# EAGLE board PCB_Radu v18 (EAGLE 9.7.0), part 1 of 3
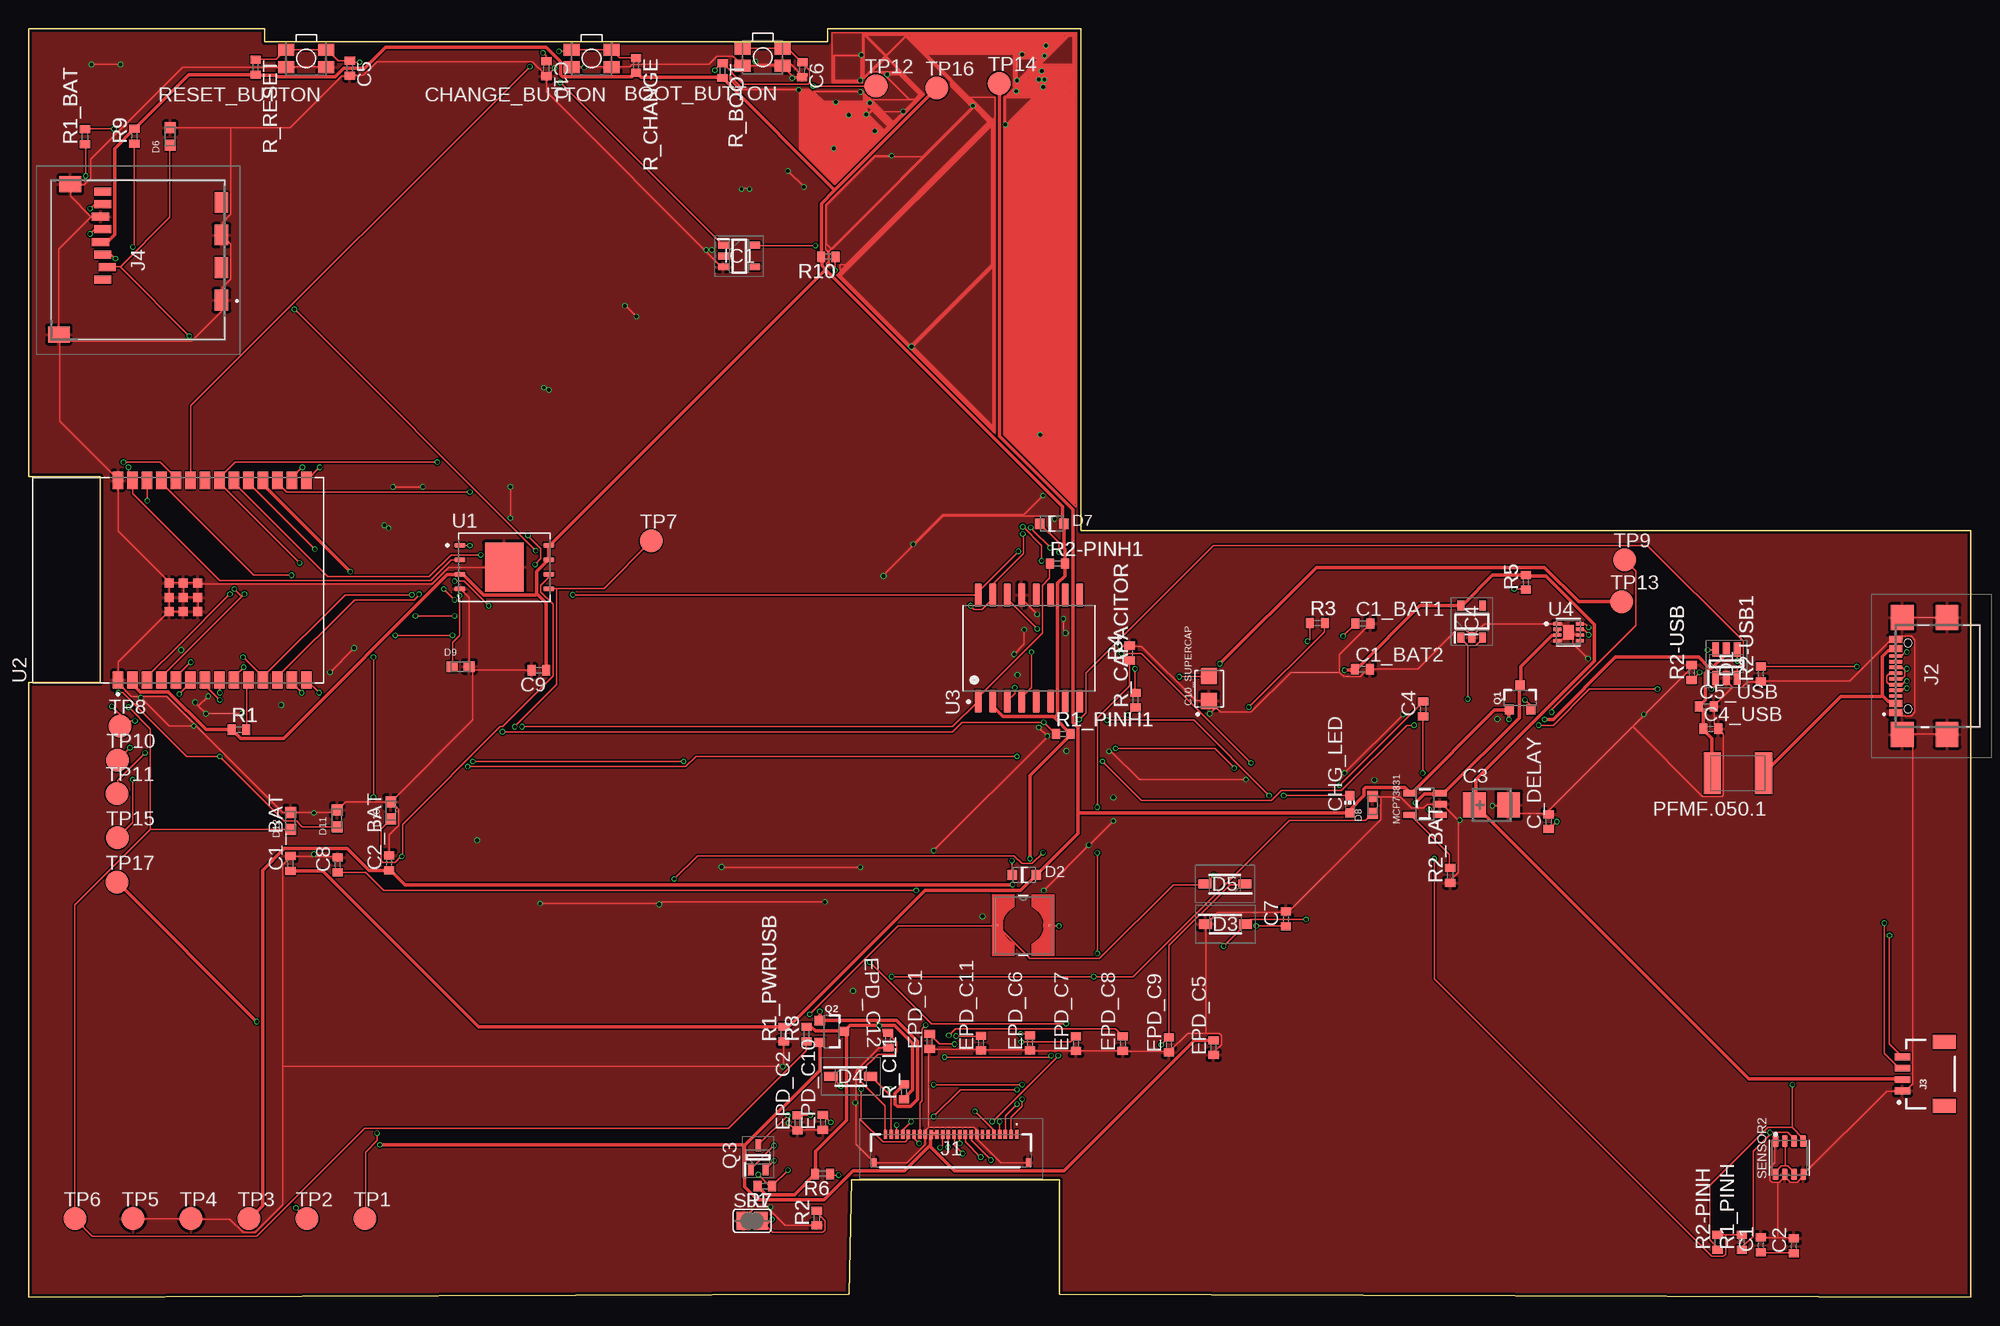
[diagram p0: board, top side]
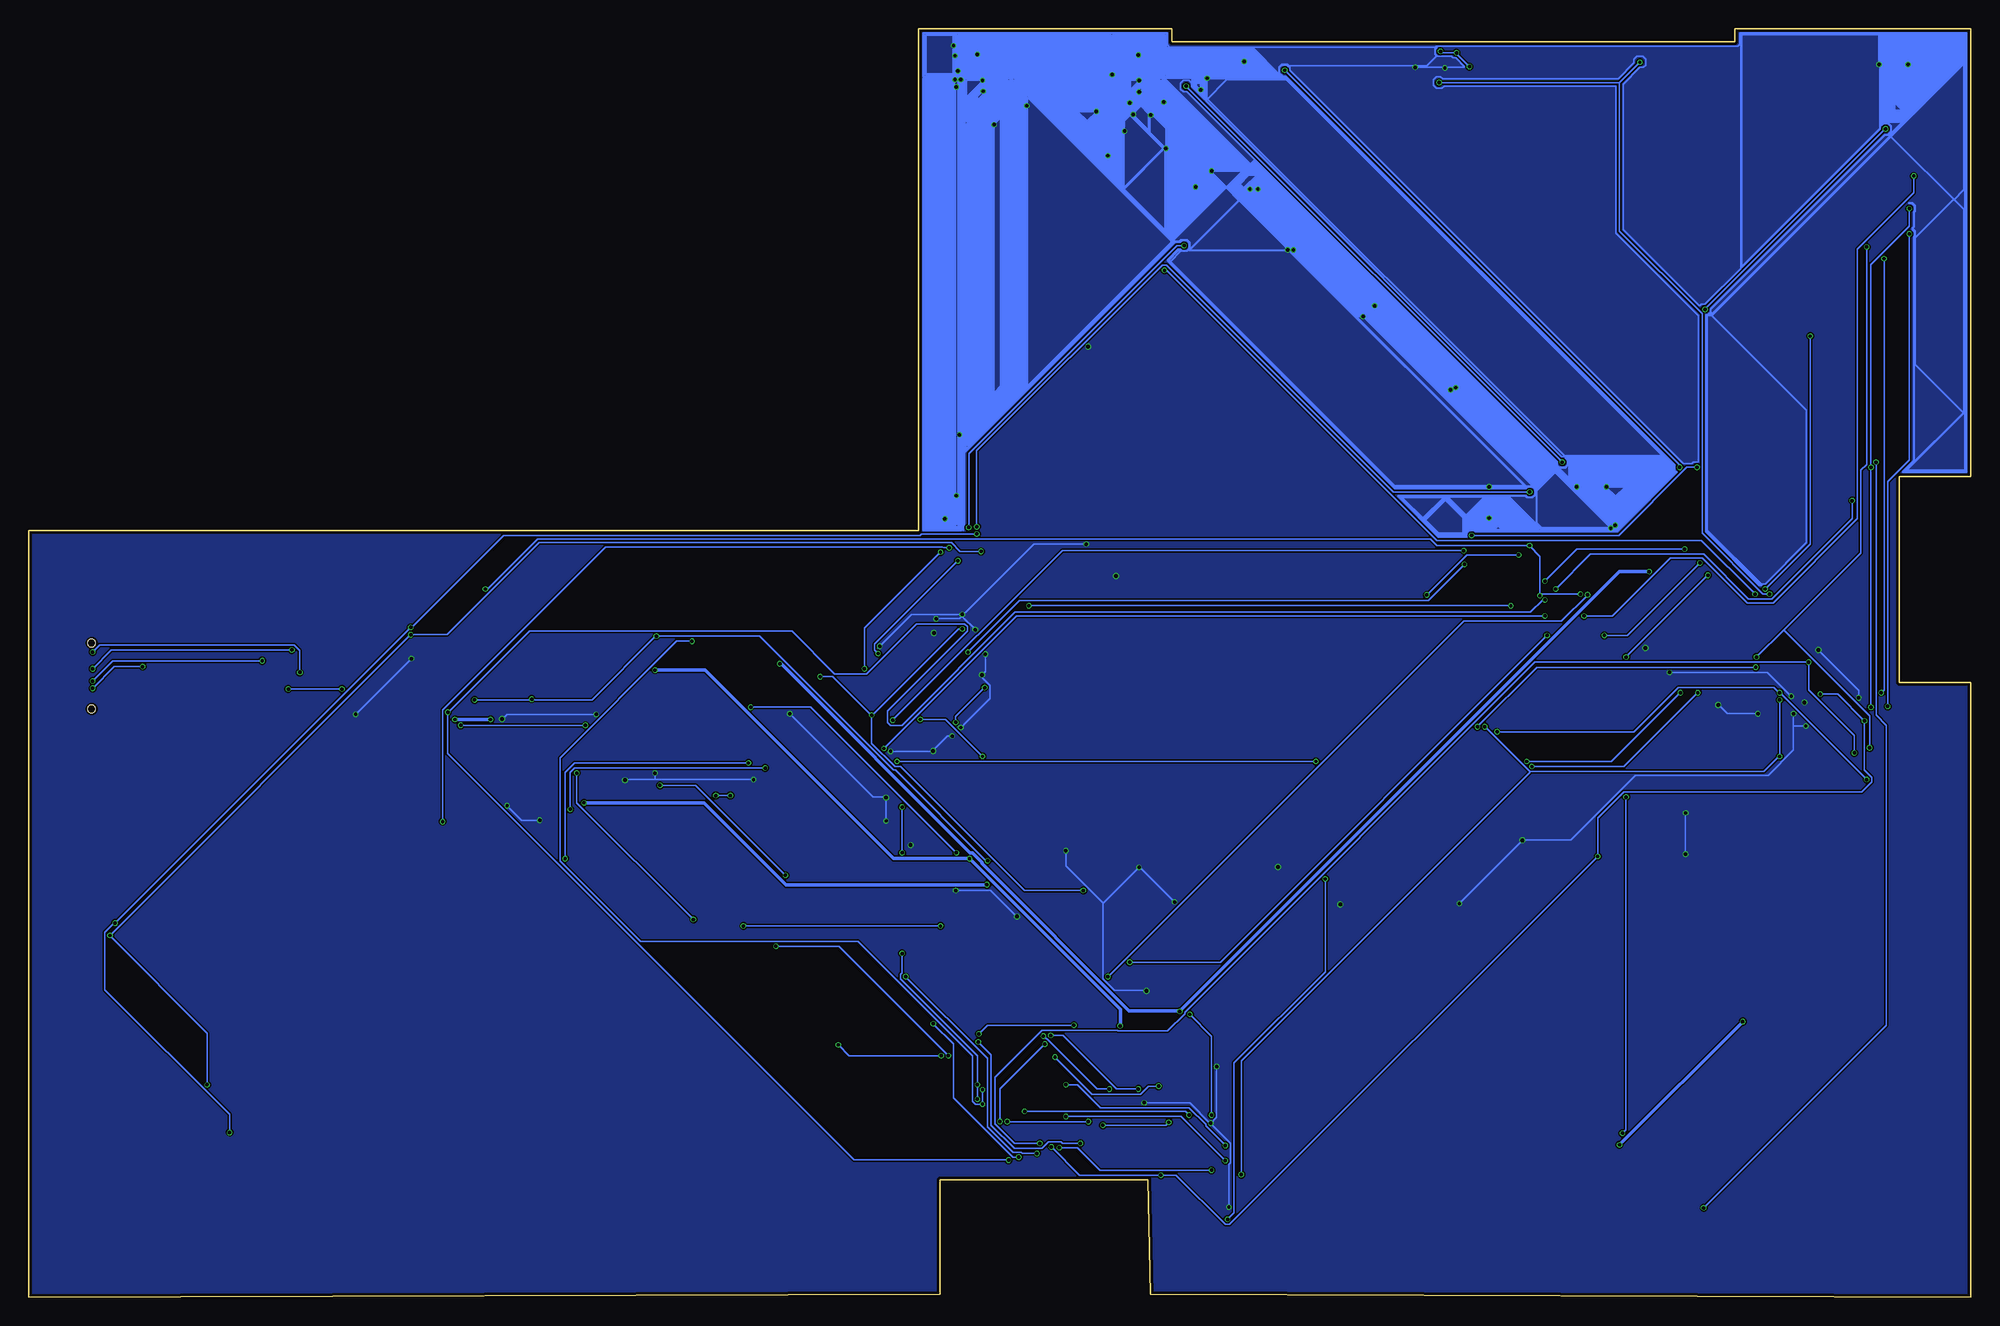
[diagram p1: board, bottom side, seen from below]

Size 170.2 x 111.2 mm. Coordinates in mm from the lower left corner, seen from the top.
Outline: 0,111.2 0,71.93 6.3,71.93 6.3,53.87 0,53.87 0,0 71.88,0.29 72.13,10.29 90.33,10.29 90.33,0.29 170.2,0 170.2,67.2 92.2,67.2 92.2,111.2 70.03,111.2 70.03,110.06 20.68,110.06 20.68,111.2 0,111.2
Copper layers (1*16): Top 0.035mm / dielectric 1.6mm / Bottom 0.035mm
Design rules "jlcpcb-2layers.dru": minimum track width 5mil, minimum drill 0.3mm, track to track 5mil, track to pad 5mil, pad to pad 5mil, via to via 5mil, smd to smd 5mil, copper to edge 0.2mm, drill to drill 6mil, minimum pad ring 10mil, minimum via ring 3mil, stop-mask expansion 4mil, vias tented up to drill 0mil, thermal gap 10mil
Net classes: 1 power: width 0.3 mm; 2 rest: width 0.15 mm

## Footprints (pad centres in the part's own frame; a part is rotated, then mirrored left to right if it is on the bottom)
MYBUTTON = smd 1.4 x 1.05: 1 1.75,0.75; 2 -1.75,0.75; 3 -1.75,-0.75; 4 1.75,-0.75
ESP32_WROVER_EAGLE-LTSPICE_C0402 = smd 0.7 x 0.9: 1 -0.65,0; 2 0.65,0
RCL_CT3528 = smd 2 x 2.2: + -1.5,0; - 1.5,0
EAGLE-LTSPICE_C0402 = smd 0.7 x 0.9: 1 -0.65,0; 2 0.65,0
CAPCP3225X100N = smd 1.4 x 1.4: 1 -1.1,0; 2 1.1,0
ADAFRUIT_CHIP-LED0603 = smd 0.8 x 0.8: A 0,-0.75; C 0,0.75
SOT95P280X145-6N = smd 1.2 x 0.6: 1 -1.25,0.95; 2 -1.25,0; 3 -1.25,-0.95; 4 1.25,-0.95; 5 1.25,0; 6 1.25,0.95
ESP32_WROVER_AVX---SD0805S020S1R0_AVX_SD0805S020S1R0_0 = smd 0.8 x 0.9: 1 -1.05,0; 2 1.05,0
SOD3716X135N = smd 1.15 x 0.8: 1 -1.75,0; 2 1.75,0
DIOC1608X36N = smd 0.97 x 0.94: 1 -0.75,0; 2 0.75,0
SOT95P280X125-5N = smd 0.9 x 0.6: 1 -1.4,0.95; 2 -1.4,0; 3 -1.4,-0.95; 4 1.4,-0.95; 5 1.4,0.95
SOT95P280X120-5N = smd 0.9 x 0.6: 1 -1.4,0.95; 2 -1.4,0; 3 -1.4,-0.95; 4 1.4,-0.95; 5 1.4,0.95
FH34SRJ24S05SH99 = smd 0.3 x 0.8: 1 5.75,1.45; 2 5.25,1.45; 3 4.75,1.45; 4 4.25,1.45; 5 3.75,1.45; 6 3.25,1.45; 7 2.75,1.45; 8 2.25,1.45; 9 1.75,1.45; 10 1.25,1.45; 11 0.75,1.45; 12 0.25,1.45; 13 -0.25,1.45; 14 -0.75,1.45; 15 -1.25,1.45; 16 -1.75,1.45; 17 -2.25,1.45; 18 -2.75,1.45; 19 -3.25,1.45; 20 -3.75,1.45; 21 -4.25,1.45; 22 -4.75,1.45; 23 -5.25,1.45; 24 -5.75,1.45 | smd 0.4 x 0.8: MP1 6.75,-1.05; MP2 -6.75,-1.05
SAMACSYS_PARTS_USB4110GFA = smd 0.3 x 1.15: A1 -3.35,3.678; A4 -2.55,3.678; A5 -1.25,3.678; A6 -0.25,3.678; A7 0.25,3.678; A8 1.25,3.678; A9 2.55,3.678; A12 3.35,3.678; B1 3.05,3.678; B4 2.25,3.678; B5 1.75,3.678; B6 0.75,3.678; B7 -0.75,3.678; B8 -1.75,3.678; B9 -2.25,3.678; B12 -3.05,3.678 | smd 2.18 x 2: MP1 -5.11,-0.827; MP2 5.11,-0.827; MP3 -5.11,3.103; MP4 5.11,3.103 | hole 0.65: -2.89,2.603; 2.89,2.603
JST04_1MM_RA = smd 0.6 x 1.35: 1 -1.5,0; 2 -0.5,0; 3 0.5,0; 4 1.5,0 | smd 1.2 x 2: NC1 2.8,-3.675; NC2 -2.8,-3.675
112ATAARR03ATTEND = smd 1.8 x 1.2: G1 10.6,10.4; G2 4.9,10.4; S1 7.75,10.4; S2 2.05,10.4 | smd 1.4 x 1.9: G3 13.6,-3.85; G4 0.45,-2.85 | smd 0.7 x 1.5: P1 8.8,0; P2 7.7,0.4; P3 6.6,0; P4 5.5,-0.2; P5 4.4,0; P6 3.3,-0.2; P7 2.2,0; P8 1.1,0
IND_4828-WE-TPC_WRE = smd 0.127 x 0.127: 1 -2.286,0; 2 2.286,0
ESP32_WROVER_SPARKFUN-IC-POWER_SOT23-5 = smd 0.55 x 1.2: 1 -0.95,-1.3; 2 0,-1.3; 3 0.95,-1.3; 4 0.95,1.3; 5 -0.95,1.3
ESP32C6_VARISTOR_CT/CN1812 = smd 1.5 x 3.6: 1 -2.25,0; 2 2.25,0
ESP32_WROVER_SPARKFUN-DISCRETESEMI_SOT23-3 = smd 0.8 x 0.9: 1 -0.95,-1; 2 0.95,-1; 3 0,1.1
SOT65P210X110-3N = smd 1.05 x 0.5: 1 -1.05,0.65; 2 -1.05,-0.65; 3 1.05,0
ESP32_WROVER_EAGLE-LTSPICE_R0402 = smd 0.7 x 0.9: 1 -0.65,0; 2 0.65,0
ESP32_WROVER_BME680_PSON80P300X300X100-8N = smd 1.016 x 0.5: 1 1.458,1.2; 2 1.458,0.4; 3 1.458,-0.4; 4 1.458,-1.2; 5 -1.458,-1.22; 6 -1.458,-0.4; 7 -1.458,0.4; 8 -1.458,1.2
SJ = smd 1.168 x 1.6: 1 -0.762,0; 2 0.762,0
TP20R = smd 2 x 2: TP 0,0
SON127P600X800X80-9N = smd 0.94 x 0.44: 1 -3.895,1.905; 2 -3.895,0.635; 3 -3.895,-0.635; 4 -3.895,-1.905; 5 3.895,-1.905; 6 3.895,-0.635; 7 3.895,0.635; 8 3.895,1.905 | smd 3.4 x 4.3: 9 0,0
XCVR_ESP32-C6-WROOM-1-N8 = smd 1.5 x 0.9: 1 -8.75,5.26; 2 -8.75,3.99; 3 -8.75,2.72; 4 -8.75,1.45; 5 -8.75,0.18; 6 -8.75,-1.09; 7 -8.75,-2.36; 8 -8.75,-3.63; 9 -8.75,-4.9; 10 -8.75,-6.17; 11 -8.75,-7.44; 12 -8.75,-8.71; 13 -8.75,-9.98; 14 -8.75,-11.25; 15 8.75,-11.25; 16 8.75,-9.98; 17 8.75,-8.71; 18 8.75,-7.44; 19 8.75,-6.17; 20 8.75,-4.9; 21 8.75,-3.63; 22 8.75,-2.36; 23 8.75,-1.09; 24 8.75,0.18; 25 8.75,1.45; 26 8.75,2.72; 27 8.75,3.99; 28 8.75,5.26 | smd 0.8 x 0.8: 29_1 -2.755,0.79; 29_2 -1.505,0.79; 29_3 -0.255,0.79; 29_4 -2.755,-0.46; 29_5 -1.505,-0.46; 29_6 -0.255,-0.46; 29_7 -2.755,-1.71; 29_8 -1.505,-1.71; 29_9 -0.255,-1.71
SOIC127P1032X265-16N = smd 2.05 x 0.59: 1 -4.655,4.445; 2 -4.655,3.175; 3 -4.655,1.905; 4 -4.655,0.635; 5 -4.655,-0.635; 6 -4.655,-1.905; 7 -4.655,-3.175; 8 -4.655,-4.445; 9 4.655,-4.445; 10 4.655,-3.175; 11 4.655,-1.905; 12 4.655,-0.635; 13 4.655,0.635; 14 4.655,1.905; 15 4.655,3.175; 16 4.655,4.445
SON50P200X200X80-9N = smd 0.76 x 0.27: 1 -0.985,0.75; 2 -0.985,0.25; 3 -0.985,-0.25; 4 -0.985,-0.75; 5 0.985,-0.75; 6 0.985,-0.25; 7 0.985,0.25; 8 0.985,0.75 | smd 0.9 x 1.3: 9 0,0

## Placement (x,y rotation side)
BOOT_BUTTON  BUTTON_CUSYOMV1  [MYBUTTON]  64.34,108.67 180 top
C1  100nF  [ESP32_WROVER_EAGLE-LTSPICE_C0402]  151.79,4.61 90 top
C1_BAT  4.7uF  [ESP32_WROVER_EAGLE-LTSPICE_C0402]  22.95,38.03 90 top
C1_BAT1  4.7uF  [ESP32_WROVER_EAGLE-LTSPICE_C0402]  116.93,59.06 0 top
C1_BAT2  4.7uF  [ESP32_WROVER_EAGLE-LTSPICE_C0402]  116.89,55.05 0 top
C2  100nF  [ESP32_WROVER_EAGLE-LTSPICE_C0402]  154.68,4.53 90 top
C2_BAT  4.7uF  [ESP32_WROVER_EAGLE-LTSPICE_C0402]  31.59,38.09 90 top
C3  100uF  [RCL_CT3528]  128.18,43.16 0 top
C4  4.7uF/25V  [ESP32_WROVER_EAGLE-LTSPICE_C0402]  122.19,51.56 90 top
C4_USB  100nF  [ESP32_WROVER_EAGLE-LTSPICE_C0402]  147.4,49.83 0 top
C5  100nF  [EAGLE-LTSPICE_C0402]  28.16,107.72 270 top
C5_USB  4.7uF  [ESP32_WROVER_EAGLE-LTSPICE_C0402]  147.02,51.8 0 top
C6  100nF  [EAGLE-LTSPICE_C0402]  67.8,107.59 268.8 top
C7  10uF  [ESP32_WROVER_EAGLE-LTSPICE_C0402]  110.17,33.17 90 top
C8  100nF  [ESP32_WROVER_EAGLE-LTSPICE_C0402]  27.1,37.92 90 top
C9  100nF  [ESP32_WROVER_EAGLE-LTSPICE_C0402]  44.72,54.96 180 top
C10  100nF  [EAGLE-LTSPICE_C0402]  45.37,107.69 270.1 top
C10_SUPERCAP  CPH3225A  [CAPCP3225X100N]  103.45,53.35 90 top
C_DELAY  100nF  [ESP32_WROVER_EAGLE-LTSPICE_C0402]  133.2,41.69 90 top
CHANGE_BUTTON  BUTTON_CUSYOMV1  [MYBUTTON]  49.34,108.58 180 top
CHG_LED  [ADAFRUIT_CHIP-LED0603]  115.77,43.22 0 top
D1  USBLC6-2SC6Y  [SOT95P280X145-6N]  148.77,55.53 90 top
D2  ESP32_WROVER_AVX---SD0805S020S1R0_AVX_SD0805S020S1R0_0_0AVX_SD0805S020S1R0_0_0  [ESP32_WROVER_AVX---SD0805S020S1R0_AVX_SD0805S020S1R0_0]  87.24,37.03 0 top
D3  MBR0530  [SOD3716X135N]  104.88,32.72 0 top
D4  MBR0530  [SOD3716X135N]  72.04,19.37 0 top
D5  MBR0530  [SOD3716X135N]  104.82,36.23 180 top
D6  PGB1010603MR  [DIOC1608X36N]  12.41,101.74 90 top
D7  ESP32_WROVER_AVX---SD0805S020S1R0_AVX_SD0805S020S1R0_0_0AVX_SD0805S020S1R0_0_0  [ESP32_WROVER_AVX---SD0805S020S1R0_AVX_SD0805S020S1R0_0]  89.66,67.81 0 top
D8  PGB1010603MR  [DIOC1608X36N]  117.77,43.17 90 top
D9  PGB1010603MR  [DIOC1608X36N]  37.87,55.28 0 top
D10  PGB1010603MR  [DIOC1608X36N]  31.75,42.67 90 top
D11  PGB1010603MR  [DIOC1608X36N]  27.04,41.96 90 top
D12  PGB1010603MR  [DIOC1608X36N]  22.96,41.75 90 top
EPD_C1  1uF/50V  [EAGLE-LTSPICE_C0402]  78.96,22.43 90 top
EPD_C2  1uF/50V  [EAGLE-LTSPICE_C0402]  67.38,15.31 90 top
EPD_C5  0.1uF/50V  [EAGLE-LTSPICE_C0402]  103.84,21.9 90 top
EPD_C6  1uF/50V  [EAGLE-LTSPICE_C0402]  87.74,22.31 90 top
EPD_C7  1uF/50V  [EAGLE-LTSPICE_C0402]  91.78,22.25 90 top
EPD_C8  1uF/50V  [EAGLE-LTSPICE_C0402]  95.88,22.25 90 top
EPD_C9  1uF/50V  [EAGLE-LTSPICE_C0402]  99.93,22.13 90 top
EPD_C10  1uF/50V  [EAGLE-LTSPICE_C0402]  69.6,15.34 90 top
EPD_C11  1uF/50V  [EAGLE-LTSPICE_C0402]  83.46,22.3 90 top
EPD_C12  1uF/50V  [EAGLE-LTSPICE_C0402]  75.33,22.54 91.8 top
IC1  BD5229G-TR  [SOT95P280X125-5N]  62.27,91.26 0 top
IC4  XC6220A331MR-G  [SOT95P280X120-5N]  126.46,59.24 90 top
J1  FH34SRJ-24S-0.5SH_99_  [FH34SRJ24S05SH99]  80.84,12.84 0 top
J2  [SAMACSYS_PARTS_USB4110GFA]  167.28,54.46 90 top
J3  QWIIC_RIGHT_ANGLE  [JST04_1MM_RA]  164.2,19.59 90 top
J4  112A-TAAR-R03_ATTEND  [112ATAARR03ATTEND]  6.51,98 270 top
L1  68uH  [IND_4828-WE-TPC_WRE]  87.16,32.61 0 top
MCP73831  ESP32_WROVER_SPARKFUN-IC-POWER_MCP73831  [ESP32_WROVER_SPARKFUN-IC-POWER_SOT23-5]  122.36,43.23 90 top
PFMF.050.1  [ESP32C6_VARISTOR_CT/CN1812]  149.78,45.95 180 top
Q1  20V/4.2A/52mΩ/1.4W  [ESP32_WROVER_SPARKFUN-DISCRETESEMI_SOT23-3]  130.7,52.52 0 top
Q2  20V/4.2A/52mΩ/1.4W  [ESP32_WROVER_SPARKFUN-DISCRETESEMI_SOT23-3]  70.34,23.31 270 top
Q3  SI1308EDL-T1-GE3  [SOT65P210X110-3N]  63.93,12.29 90 top
R1  10K  [ESP32_WROVER_EAGLE-LTSPICE_R0402]  18.44,49.75 0 top
R1_BAT  200  [ESP32_WROVER_EAGLE-LTSPICE_R0402]  4.95,101.71 90 top
R1_PINH  10k  [ESP32_WROVER_EAGLE-LTSPICE_R0402]  150.12,4.84 90 top
R1_PINH1  10K  [ESP32_WROVER_EAGLE-LTSPICE_R0402]  90.66,49.37 0 top
R1_PWRUSB  100K  [ESP32_WROVER_EAGLE-LTSPICE_R0402]  66.18,23.07 90 top
R2  2.2  [ESP32_WROVER_EAGLE-LTSPICE_R0402]  69.07,6.96 90 top
R2-PINH  10k  [ESP32_WROVER_EAGLE-LTSPICE_R0402]  148,4.84 90 top
R2-PINH1  10K  [ESP32_WROVER_EAGLE-LTSPICE_R0402]  90.16,64.31 0 top
R2-USB  5k1  [ESP32_WROVER_EAGLE-LTSPICE_R0402]  145.73,54.78 90 top
R2-USB1  5k1  [ESP32_WROVER_EAGLE-LTSPICE_R0402]  151.79,54.64 90 top
R2_BAT  2K  [ESP32_WROVER_EAGLE-LTSPICE_R0402]  124.57,36.98 90 top
R3  0.47  [ESP32_WROVER_EAGLE-LTSPICE_R0402]  112.94,59.11 0 top
R4  10K  [ESP32_WROVER_EAGLE-LTSPICE_R0402]  96.48,56.47 90 top
R5  10K  [ESP32_WROVER_EAGLE-LTSPICE_R0402]  131.19,62.67 90 top
R6  10K  [ESP32_WROVER_EAGLE-LTSPICE_R0402]  69.57,10.83 180 top
R7  10K  [ESP32_WROVER_EAGLE-LTSPICE_R0402]  64.51,9.76 180 top
R8  10K  [ESP32_WROVER_EAGLE-LTSPICE_R0402]  68.18,23.08 90 top
R9  10K  [ESP32_WROVER_EAGLE-LTSPICE_R0402]  9.28,101.78 90 top
R10  10K  [ESP32_WROVER_EAGLE-LTSPICE_R0402]  70.07,91.19 180 top
R_BOOT  10K  [ESP32_WROVER_EAGLE-LTSPICE_R0402]  60.82,107.51 268.9 top
R_CAPACITOR  15  [ESP32_WROVER_EAGLE-LTSPICE_R0402]  97.01,52.34 90 top
R_CHANGE  10K  [ESP32_WROVER_EAGLE-LTSPICE_R0402]  53.24,107.96 270 top
R_CL1  10K  [ESP32_WROVER_EAGLE-LTSPICE_R0402]  76.71,18.02 90 top
R_RESET  10K  [ESP32_WROVER_EAGLE-LTSPICE_R0402]  19.91,107.82 270 top
RESET_BUTTON  BUTTON_CUSYOMV1  [MYBUTTON]  24.33,108.58 180 top
SENSOR2  BME688  [ESP32_WROVER_BME680_PSON80P300X300X100-8N]  154.29,12.25 90 top
SJ1  [SJ]  63.4,6.72 0 top
TP1  TPTP20R  [TP20R]  29.48,6.9 0 top
TP2  TPTP20R  [TP20R]  24.4,6.9 0 top
TP3  TPTP20R  [TP20R]  19.32,6.9 0 top
TP4  TPTP20R  [TP20R]  14.24,6.9 0 top
TP5  TPTP20R  [TP20R]  9.16,6.9 0 top
TP6  TPTP20R  [TP20R]  4.08,6.9 0 top
TP7  TPTP20R  [TP20R]  54.57,66.29 0 top
TP8  TPTP20R  [TP20R]  8.02,50.06 0 top
TP9  TPTP20R  [TP20R]  139.87,64.64 0 top
TP10  TPTP20R  [TP20R]  7.8,47.07 0 top
TP11  TPTP20R  [TP20R]  7.75,44.16 0 top
TP12  TPTP20R  [TP20R]  74.26,106.18 0 top
TP13  TPTP20R  [TP20R]  139.6,60.96 0 top
TP14  TPTP20R  [TP20R]  85.05,106.39 0 top
TP15  TPTP20R  [TP20R]  7.78,40.27 0 top
TP16  TPTP20R  [TP20R]  79.58,105.98 0 top
TP17  TPTP20R  [TP20R]  7.76,36.38 0 top
U1  W25Q512JVEIQ  [SON127P600X800X80-9N]  41.69,64.01 0 top
U2  ESP32-C6-WROOM-1-N8  [XCVR_ESP32-C6-WROOM-1-N8]  13.1,62.85 90 top
U3  DS3231SN#  [SOIC127P1032X265-16N]  87.66,56.91 90 top
U4  MAX17048G+T10  [SON50P200X200X80-9N]  134.94,58.3 0 top

## Library data of the parts
BOOT_BUTTON CHANGE_BUTTON CHG_LED PFMF.050.1 RESET_BUTTON SJ1 TP1-TP17 = DeskAssistant v19 v1
C1 C1_BAT C1_BAT1 C1_BAT2 C2 C2_BAT C4 C4_USB C5 C5_USB C6-C10 C_DELAY EPD_C1 EPD_C2 EPD_C5-EPD_C12 = DeskAssistant v19 v1; SPICEMODEL: NONE; SPICEPREFIX: C
C3 = DeskAssistant v19 v1; SPICEPREFIX: C
C10_SUPERCAP = DeskAssistant v19 v1; AVAILABILITY: Not in stock; CHECK_PRICES: https://www.snapeda.com/parts/CPH3225A/Seiko+Instruments/view-part/?ref=eda; DESCRIPTION: 11 mF (EDLC) Supercapacitor 3.3 V 1210 (3225 Metric) - -; MF: Seiko Instruments; MP: CPH3225A; PACKAGE: 1210 Seiko; PRICE: None; PURCHASE-URL: https://www.snapeda.com/api/url_track_click_mouser/?unipart_id=562593&manufacturer=Seiko Instruments&part_name=CPH3225A&search_term=None; SNAPEDA_LINK: https://www.snapeda.com/parts/CPH3225A/Seiko+Instruments/view-part/?ref=snap
D1 = DeskAssistant v19 v1; AVAILABILITY: In Stock; CHECK_PRICES: https://www.snapeda.com/parts/USBLC6-2SC6Y/STMicroelectronics/view-part/?ref=eda; DESCRIPTION: 17V Clamp 5A (8/20µs) Ipp Tvs Diode Surface Mount SOT-23-6; MF: STMicroelectronics; MP: USBLC6-2SC6Y; PACKAGE: SOT-23-6 STMicroelectronics; PRICE: None; SNAPEDA_LINK: https://www.snapeda.com/parts/USBLC6-2SC6Y/STMicroelectronics/view-part/?ref=snap
D2 D7 = DeskAssistant v19 v1; CENTROID_NOT_SPECIFIED: No; DATASHEET: http://datasheets.avx.com/schottky.pdf; DIGIKEY_DESCRIPTION: DIODE SCHOTTKY 20V 1A 0805; DIGIKEY_PART_NUMBER: 478-7800-1-ND; LEAD_FREE: yes; MF: AVX; MOUSER_PART_NUMBER: 581-SD0805S020S1R0; PACKAGE: 0805 (2012 metric); PREFIX: D; ROHS: yes; TEMPERATURE_RANGE_HIGH: +125°C; TEMPERATURE_RANGE_LOW: -55°C
D3-D5 = DeskAssistant v19 v1; AVAILABILITY: In Stock; CHECK_PRICES: https://www.snapeda.com/parts/MBR0530/Onsemi/view-part/?ref=eda; DESCRIPTION: Diode Schottky 30 V 500mA Surface Mount SOD-123; MF: ON Semiconductor; MP: MBR0530; PACKAGE: SOD-123-2 ON Semiconductor; PRICE: None; PURCHASE-URL: https://www.snapeda.com/api/url_track_click_mouser/?unipart_id=179458&manufacturer=ON Semiconductor&part_name=MBR0530&search_term=None; SNAPEDA_LINK: https://www.snapeda.com/parts/MBR0530/Onsemi/view-part/?ref=snap
D6 D8-D12 = DeskAssistant v19 v1; AVAILABILITY: In Stock; CHECK_PRICES: https://www.snapeda.com/parts/PGB1010603MR/Littelfuse/view-part/?ref=eda; DESCRIPTION: 150V (Typ) Clamp - Ipp Tvs Diode Surface Mount 0603 (1608 Metric); MF: Littelfuse Inc.; MP: PGB1010603MR; PACKAGE: 0603 Littelfuse Inc.; PRICE: None; PURCHASE-URL: https://www.snapeda.com/api/url_track_click_mouser/?unipart_id=5659453&manufacturer=Littelfuse Inc.&part_name=PGB1010603MR&search_term=None; SNAPEDA_LINK: https://www.snapeda.com/parts/PGB1010603MR/Littelfuse/view-part/?ref=snap
IC1 = DeskAssistant v19 v1; DESCRIPTION: Voltage Detector with Adjustable Delay Time: CMOS processes are utilized to develop high precision, low current consumption CMOS reset ICs that allow arbitrary setting of the delay time. The extensive lineup includes both Nch Open Drain and CMOS output types in a wide range of detection voltages (from 2.3V to 6.0V, in 0.1V steps), enabling selection of the ideal solution based on customer requirements. In addition, the entire series is of course both lead-free and RoHS-compliant.; HEIGHT: 1.25mm; MANUFACTURER_NAME: ROHM Semiconductor; MANUFACTURER_PART_NUMBER: BD5229G-TR; MOUSER_PART_NUMBER: 755-BD5229G-TR; MOUSER_PRICE-STOCK: https://www.mouser.co.uk/ProductDetail/ROHM-Semiconductor/BD5229G-TR?qs=4kLU8WoGk0vvnhrrYwdszw%3D%3D
IC4 = DeskAssistant v19 v1; DESCRIPTION: LDO Voltage Regulators; HEIGHT: 1.2mm; MANUFACTURER_NAME: Torex; MANUFACTURER_PART_NUMBER: XC6220A331MR-G; MOUSER_PART_NUMBER: 865-XC6220A331MR-G; MOUSER_PRICE-STOCK: https://www.mouser.co.uk/ProductDetail/Torex-Semiconductor/XC6220A331MR-G?qs=AsjdqWjXhJ8ZSWznL1J0gg%3D%3D
J1 = DeskAssistant v19 v1; DESCRIPTION: 24 Position FFC, FPC Connector Contacts, Top and Bottom 0.020" (0.50mm) Surface Mount, Right Angle; HEIGHT: 1.1mm; MANUFACTURER_NAME: Hirose; MANUFACTURER_PART_NUMBER: FH34SRJ-24S-0.5SH(99); MOUSER_PART_NUMBER: 798-FH34SRJ24S05SH99; MOUSER_PRICE-STOCK: https://www.mouser.co.uk/ProductDetail/Hirose-Connector/FH34SRJ-24S-0.5SH99?qs=vcbW%252B4%252BSTIpKBl5ap9J8Fw%3D%3D
J2 = DeskAssistant v19 v1; DESCRIPTION: CONN USB 2.0 TYPE-C R/A SMT; HEIGHT: 3.26mm; MANUFACTURER_NAME: GCT (GLOBAL CONNECTOR TECHNOLOGY); MANUFACTURER_PART_NUMBER: USB4110-GF-A; MOUSER_PART_NUMBER: 640-USB4110-GF-A; MOUSER_PRICE-STOCK: https://www.mouser.co.uk/ProductDetail/GCT/USB4110-GF-A?qs=KUoIvG%2F9IlYiZvIXQjyJeA%3D%3D
J3 = DeskAssistant v19 v1; PROD_ID: CONN-13694
J4 = DeskAssistant v19 v1; DESCRIPTION: Micro SD Card Socket, Push-Push Type, Top Mount, SMT, H=1.83mm, 10u; HEIGHT: 1.9mm; MANUFACTURER_NAME: ATTEND; MANUFACTURER_PART_NUMBER: 112A-TAAR-R03 ATTEND
L1 = DeskAssistant v19 v1; COPYRIGHT: Copyright (C) 2024 Ultra Librarian. All rights reserved.; MANUFACTURER_PART_NUMBER: 744043680; MFR_NAME: Wurth Electronics
MCP73831 = DeskAssistant v19 v1; PROD_ID: IC-09995
Q1 Q2 = DeskAssistant v19 v1; PROD_ID: TRAN-14388
Q3 = DeskAssistant v19 v1; AVAILABILITY: In Stock; CHECK_PRICES: https://www.snapeda.com/parts/SI1308EDL-T1-GE3/Vishay+Siliconix/view-part/?ref=eda; DESCRIPTION: Si1308EDL-T1-GE3 N-channel MOSFET Transistor, 1.5 A, 30 V, 3-Pin SC-70 | Siliconix / Vishay SI1308EDL-T1-GE3; MF: Vishay Siliconix; MP: SI1308EDL-T1-GE3; PACKAGE: SOT-323 Vishay Semiconductor; PRICE: None; PURCHASE-URL: https://www.snapeda.com/api/url_track_click_mouser/?unipart_id=274603&manufacturer=Vishay Siliconix&part_name=SI1308EDL-T1-GE3&search_term=None; SNAPEDA_LINK: https://www.snapeda.com/parts/SI1308EDL-T1-GE3/Vishay+Siliconix/view-part/?ref=snap
R1 R1_BAT R1_PINH R1_PINH1 R1_PWRUSB R2 R2-PINH R2-PINH1 R2-USB R2-USB1 R2_BAT R3-R10 R_BOOT R_CAPACITOR R_CHANGE R_CL1 R_RESET = DeskAssistant v19 v1; SPICEMODEL: NONE; SPICEPREFIX: R
SENSOR2 = DeskAssistant v19 v1; AVAILABILITY: Unavailable; DESCRIPTION: Integrated Environmental Unit; MF: Bosch Sensortec; MP: BME680; PACKAGE: LGA-8 Bosch Tools; PRICE: None
U1 = DeskAssistant v19 v1; AVAILABILITY: In Stock; CHECK_PRICES: https://www.snapeda.com/parts/W25Q512JVEIQ/Winbond+Electronics/view-part/?ref=eda; DESCRIPTION: FLASH - NOR Memory IC 512Mb (64M x 8) SPI - Quad I/O 133 MHz 8-WSON (8x6); MF: Winbond Electronics; MP: W25Q512JVEIQ; PACKAGE: Package; PRICE: None; SNAPEDA_LINK: https://www.snapeda.com/parts/W25Q512JVEIQ/Winbond+Electronics/view-part/?ref=snap
U2 = DeskAssistant v19 v1; AVAILABILITY: In Stock; CHECK_PRICES: https://www.snapeda.com/parts/ESP32-C6-WROOM-1-N8/Espressif+Systems/view-part/?ref=eda; DESCRIPTION: Multiprotocol Modules ESP32-C6 module, Wi-Fi 6 in 2.4 GHz band, Bluetooth 5, Zigbee 3.0 and Thread. ESP34-WROOM Compatible - ENGINEERING SAMPLE; MF: Espressif Systems; MP: ESP32-C6-WROOM-1-N8; PACKAGE: None; PRICE: None; SNAPEDA_LINK: https://www.snapeda.com/parts/ESP32-C6-WROOM-1-N8/Espressif+Systems/view-part/?ref=snap
U3 = DeskAssistant v19 v1; AVAILABILITY: In Stock; CHECK_PRICES: https://www.snapeda.com/parts/DS3231SN%23/Analog+Devices/view-part/?ref=eda; DESCRIPTION: Extremely Accurate I²C-Integrated RTC/TCXO/Crystal; MF: Analog Devices; MP: DS3231SN#; PACKAGE: SOIC-16 Maxim; PRICE: None; PURCHASE-URL: https://www.snapeda.com/api/url_track_click_mouser/?unipart_id=99048&manufacturer=Analog Devices&part_name=DS3231SN#&search_term=None; SNAPEDA_LINK: https://www.snapeda.com/parts/DS3231SN%23/Analog+Devices/view-part/?ref=snap
U4 = DeskAssistant v19 v1; AVAILABILITY: In Stock; CHECK_PRICES: https://www.snapeda.com/parts/MAX17048G+T10/Analog+Devices/view-part/?ref=eda; DESCRIPTION: 3µA 1-Cell/2-Cell Fuel Gauge with ModelGauge; MF: Analog Devices; MP: MAX17048G+T10; PACKAGE: TDFN-8 Maxim; PRICE: None; PURCHASE-URL: https://www.snapeda.com/api/url_track_click_mouser/?unipart_id=329239&manufacturer=Analog Devices&part_name=MAX17048G+T10&search_term=None; SNAPEDA_LINK: https://www.snapeda.com/parts/MAX17048G+T10/Analog+Devices/view-part/?ref=snap

## Nets
3V3 [power]: C1_BAT2.1 C3.+ C9.1 D7.2 IC4.5 J3.2 J4.P4 Q2.3 R1.1 R1_PINH1.2 R2-PINH1.2 R5.2 R6.2 R7.2 R8.2 R9.2 R10.2 R_BOOT.2 R_CHANGE.2 R_CL1.1 R_RESET.2 TP16.TP U1.3 U1.7 U1.8 U2.2 U3.2
32KHZ [rest]: R2-PINH1.1 U2.9 U3.1
DN [rest]: D1.4 J2.A7 J2.B7
DP [rest]: D1.6 J2.A6 J2.B6
EDP_3V3 [rest]: C7.1 L1.2
EPD_3V3 [power]: EPD_C5.2 J1.15 J1.16 Q2.2 TP17.TP
EPD_3V3_C [power]: Q2.1 R_CL1.2 TP13.TP U2.18
EPD_BUSY [rest]: J1.9 TP9.TP U2.26
EPD_CS [rest]: D8.1 J1.12 R9.1 TP10.TP U2.11
EPD_DC [rest]: J1.11 TP11.TP U2.5
EPD_RST [rest]: J1.10 TP12.TP U2.21
FLASH_CS [rest]: D9.1 R5.1 U1.1 U2.12
GDR [rest]: J1.2 Q3.1 R4.1
GND [rest]: BOOT_BUTTON.1 BOOT_BUTTON.2 C1.2 C1_BAT1.2 C1_BAT2.2 C1_BAT.2 C2.2 C2_BAT.2 C3.- C4_USB.2 C5.2 C5_USB.2 C6.2 C7.2 C8.2 C9.2 C10.2 C10_SUPERCAP.1 C_DELAY.2 CHANGE_BUTTON.1 CHANGE_BUTTON.2 D1.2 D3.1 D6.2 D8.2 D9.2 D10.2 D11.2 D12.2 EPD_C1.1 EPD_C2.1 EPD_C5.1 EPD_C6.1 EPD_C7.1 EPD_C8.1 EPD_C9.1 EPD_C10.1 EPD_C11.1 EPD_C12.1 IC1.3 IC4.2 J1.8 J1.17 J1.MP1 J1.MP2 J2.A1 J2.A12 J2.B1 J2.B12 J2.MP1 J2.MP2 J2.MP3 J2.MP4 J3.1 J4.G1 J4.G2 J4.G3 J4.G4 J4.P6 MCP73831.2 R1_PWRUSB.1 R2-USB1.1 R2-USB.2 R2.1 R2_BAT.1 R4.2 RESET_BUTTON.1 RESET_BUTTON.2 SENSOR2.1 SENSOR2.5 SENSOR2.7 SJ1.1 TP4.TP TP5.TP U1.4 U1.9 U2.1 U2.28 U2.29_1 U2.29_2 U2.29_3 U2.29_4 U2.29_5 U2.29_6 U2.29_7 U2.29_8 U2.29_9 U3.13 U4.1 U4.4 U4.6 U4.9
GPIO8 [rest]: R1.2 U2.10
I2C_PW [rest]: R1_PINH.2 R2-PINH.2 U2.17
IC2_PW [rest]: C1.1 C2.1
INT_RTC [rest]: R1_PINH1.1 TP15.TP U2.8 U3.3
IO/BOOT [rest]: BOOT_BUTTON.3 BOOT_BUTTON.4 C6.1 R_BOOT.1 U2.15
IO/CHANGE [rest]: C10.1 CHANGE_BUTTON.3 CHANGE_BUTTON.4 R_CHANGE.1 U2.23
MISO [rest]: D12.1 J4.P7 R8.1 TP6.TP U1.2 U2.27
MOSI [rest]: D11.1 J1.14 J4.P3 R7.1 TP7.TP U1.5 U2.7
N$1 [rest]: EPD_C10.2 J1.22
N$2 [rest]: C1_BAT1.1 D2.1 IC4.1 IC4.3 Q1.2
N$3 [rest]: MCP73831.5 R2_BAT.2
N$4 [rest]: EPD_C8.2 J1.20
N$5 [rest]: J2.B5 R2-USB.1
N$6 [rest]: C4.1 D3.2 D4.1
N$7 [rest]: MCP73831.1 R1_BAT.1
N$8 [rest]: CHG_LED.C R1_BAT.2
N$9 [rest]: EPD_C7.2 J1.19
N$10 [rest]: J2.A5 R2-USB1.2
N$11 [rest]: EPD_C6.2 J1.18
N$12 [rest]: EPD_C12.2 J1.24
N$13 [rest]: D7.1 R_CAPACITOR.2
N$14 [rest]: EPD_C2.2 J1.5
N$15 [rest]: EPD_C1.2 J1.4
N$17 [rest]: SENSOR2.2 SENSOR2.6 SENSOR2.8
N$21 [rest]: C_DELAY.1 IC1.5
PREVGH [rest]: D5.1 EPD_C9.2 J1.21
PREVGL [rest]: D4.2 EPD_C11.2 J1.23
RESE [rest]: J1.3 Q3.2 R3.1
RESE' [rest]: R2.2 R3.2 SJ1.2
RESET [rest]: C5.1 IC1.1 R_RESET.1 RESET_BUTTON.3 RESET_BUTTON.4 U2.3
RTC_RST [rest]: U2.16 U3.4
RX [rest]: TP2.TP U2.24
SCK [rest]: D10.1 J1.13 J4.P5 R6.1 TP8.TP U1.6 U2.6
SCL [rest]: J3.4 R2-PINH.1 SENSOR2.4 U2.20 U3.16 U4.7
SDA [rest]: J3.3 R1_PINH.1 SENSOR2.3 U2.19 U3.15 U4.8
SRC [rest]: C4.2 D5.2 L1.1 Q3.3
SS_SD [rest]: D6.1 J4.P2 R10.1 U2.4
TX [rest]: TP1.TP U2.25
USB_D+ [rest]: D1.1 U2.14
USB_D- [rest]: D1.3 U2.13
VBAT [power]: C2_BAT.1 MCP73831.3 Q1.3 TP3.TP U4.2 U4.3
VBUS [power]: C1_BAT.1 C4_USB.1 C5_USB.1 CHG_LED.A D1.5 D2.2 MCP73831.4 PFMF.050.1.2 Q1.1 R1_PWRUSB.2 TP14.TP
VRTC [rest]: C8.1 C10_SUPERCAP.2 R_CAPACITOR.1 U3.14
VUSB [power]: J2.A4 J2.A9 J2.B4 J2.B9 PFMF.050.1.1

## Tracks (layer width: path | path; a pad name or v marks a point on that pad's centre or on a via)
3V3  (via drill 0.3)
  Top 0.3: J3.2 164.14,19.15 150.74,19.15 126.74,43.16 C3.+ 126.8,43.28 126.8,45.38 137.22,55.79 137.22,58.97 132.96,63.22 131.31,63.22 R5.2 131.18,63.29 128.26,63.29 125.66,60.68 IC4.5 125.47,60.62 121.91,60.62 116.39,55.09 116.26,55.09 C1_BAT2.1 116.14,54.97 v115.31,54.97 | U2.2 9.14,54.08 9.14,53.7 9.77,53.06 12.25,53.06 15.55,49.76 17.77,49.76 R1.1 17.9,49.7 18.6,49 22.35,49 36.7,63.35 37.65,63.35 U1.3 37.84,63.35 38.09,63.35 39.87,61.57 44.44,61.57 44.54,61.67 | 44.54,61.67 44.51,61.7 44.51,63.6 45.52,64.62 U1.7 45.59,64.75 45.59,65.89 U1.8 45.71,65.95 69.84,90.08 | 44.54,61.67 45.33,60.87 45.33,54.97 C9.1 | J4.P4 6.34,92.5 6.92,92.5 7.55,93.13 7.55,100.69 9.27,102.4 R9.2 9.39,102.53 14.03,107.17 19.87,107.17 R_RESET.2 20,107.1 21.65,107.1 21.77,106.97 26.85,106.97 27.62,107.74 29.46,107.74 31.3,109.58 45.33,109.58 46.6,108.31 46.6,107.17 46.79,106.97 52.89,106.97 53.14,107.23 R_CHANGE.2 53.27,107.29 53.65,106.91 60.76,106.91 R_BOOT.2 60.89,106.78 70.64,97.04 | R7.2 63.87,9.76 64.64,8.99 67.11,8.99 68.89,10.77 R6.2 68.95,10.96 68.95,12.8 71.69,15.53 71.69,23.09 71.56,23.22 Q2.3 | R8.2 68.19,23.73 68.57,23.73 68.95,23.34 71.43,23.34 Q2.3 | 74.54,23.85 72,23.85 71.56,23.41 Q2.3 | 74.54,23.85 75.88,23.85 77.46,22.27 77.46,18.2 76.77,17.5 76.77,17.38 R_CL1.1 | 89.88,50.81 89.78,50.9 85.4,50.9 84.51,51.79 84.51,52.24 U3.2 | 89.88,50.81 R1_PINH1.2 91.24,49.25 87.75,45.76 v87.75,38.46 | 89.88,50.81 90.16,51.09 90.16,62.59 90.8,63.22 90.8,64.18 R2-PINH1.2 90.8,64.37 90.8,65.57 90.74,65.64 90.74,67.8 D7.2 90.61,67.92 90.61,69.32 69.84,90.08
  Top 0.3: 70.64,97.04 79.56,105.96 TP16.TP | 70.64,97.04 69.46,95.86 69.46,91.23 R10.2 69.53,91.1 69.53,90.4 69.84,90.08 | v74.54,23.79 74.54,23.85
  Bottom 0.3: v74.54,23.79 74.54,25.25 v87.75,38.46 94.42,38.46 110.93,54.97 v115.31,54.97
32KHZ  (via drill 0.3)
  Top 0.15: R2-PINH1.1 89.47,64.3 89.47,63.03 88.83,62.4 88.83,58.21 83.24,52.62 83.24,52.3 U3.1 83.18,52.24 80.96,50.02 v43.24,50.02 | v18.85,55.22 18.03,54.4 18.03,54.14 U2.9
  Bottom 0.15: v18.85,55.22 38.03,55.22 v43.24,50.02
DN  (via drill 0.3)
  Top 0.15: J2.A7 163.57,54.65 163,54.65 162.81,54.46 162.81,53.95 163,53.76 163.57,53.76 J2.B7 163.63,53.76 164.2,53.76 164.46,54.02 v164.59,54.02 | v149.73,55.79 149.73,56.75 D1.4
  Bottom 0.15: v149.73,55.79 162.81,55.79 v164.59,54.02
DP  (via drill 0.3)
  Top 0.15: 164.4,54.97 164.4,54.46 164.2,54.27 163.63,54.27 J2.A6 | 164.4,54.97 164.2,55.16 163.63,55.16 J2.B6 | v147.12,56.75 147.76,56.75 D1.6 | v164.59,55.09 164.46,54.97 164.4,54.97
  Bottom 0.15: v147.12,56.75 162.93,56.75 v164.59,55.09
EDP_3V3  (via drill 0.3)
  Top 0.15: v107.56,32.55 110.17,32.55 C7.1 | v90.29,32.55 89.46,32.55 L1.2
  Bottom 0.15: v90.29,32.55 v107.56,32.55
EPD_3V3  (via drill 0.3)
  Top 0.3: J1.15 79.56,14.33 79.11,14.33 J1.16 79.05,14.14 79.05,13.38 78.96,13.28 | 62.73,13.31 69.34,19.92 69.34,22.33 Q2.2 | 62.73,13.31 62.73,9.69 63.87,8.55 69.72,8.55 72.26,11.09 76.77,11.09 78.96,13.28 | 78.96,13.28 81.15,11.09 90.74,11.09 102.17,22.52 103.82,22.52 EPD_C5.2 | v20,24.17 7.8,36.36 TP17.TP | v30.79,13.38 62.6,13.38 62.73,13.31
  Bottom 0.3: v30.79,13.38 v20,24.17
EPD_3V3_C  (via drill 0.3)
  Top 0.3: R_CL1.2 76.7,18.65 75.94,17.88 75.94,16.93 76.13,16.74 77.27,16.74 77.91,17.38 77.91,22.46 76.07,24.3 69.4,24.3 Q2.1 69.34,24.42 v69.34,25.06 | v28.19,63.6 20.57,71.22 20.57,71.54 U2.18 | v104.39,55.54 112.83,63.99 132.84,63.99 135.82,61 139.57,61 TP13.TP
  Bottom 0.3: v28.19,63.6 30.79,63.6 v69.34,25.06 69.46,25.12 73.78,25.12 86.67,38.01 86.67,38.14 87.5,38.97 87.69,38.97 104.26,55.54 v104.39,55.54
EPD_BUSY  (via drill 0.3)
  Top 0.15: v84.32,12.04 82.61,13.76 82.61,14.26 J1.9 | v133.47,51.28 133.47,51.54 140.84,58.91 140.84,63.67 139.88,64.62 TP9.TP | v10.41,69.83 10.41,71.54 U2.26 | v37.33,61.13 v36.38,62.08
  Bottom 0.15: v84.32,12.04 97.85,12.04 133.47,47.67 v133.47,51.28 133.41,51.28 126.3,58.4 103.31,58.4 99.56,54.65 96.77,54.65 92.39,59.03 88.2,59.03 87.94,58.78 87.94,58.4 94.93,51.41 94.93,50.4 94.67,50.14 93.66,50.14 83.75,60.05 38.6,60.05 37.52,61.13 v37.33,61.13 | v10.41,69.83 10.41,68.24 17.46,61.19 19.49,61.19 23.43,65.13 33.33,65.13 v36.38,62.08
EPD_CS  (via drill 0.3)
  Top 0.15: v81.85,12.61 81.15,13.31 81.15,14.26 J1.12 | D8.1 117.72,42.39 117.15,41.82 110.48,41.82 96.77,28.11 v93.34,28.11 v75.62,28.11 | v9.14,92.05 9.27,92.18 9.27,101.07 R9.1 | v18.79,56.11 20.5,54.4 20.5,54.14 U2.11 20.57,54.4 27.74,61.57 v33.59,61.57 | v8.88,48.17 7.8,47.09 TP10.TP
  Bottom 0.15: v81.85,12.61 83.12,12.61 83.24,12.74 83.94,12.74 86.16,14.96 86.16,20.93 v93.34,28.11 | v9.14,92.05 9.14,73 9.65,72.49 9.65,65.25 16.41,58.49 | v18.79,56.11 16.41,58.49 | v8.88,48.17 8.88,50.97 16.41,58.49 | v75.62,28.11 44.44,59.29 35.87,59.29 v33.59,61.57
EPD_DC  (via drill 0.3)
  Top 0.15: v81.59,13.5 81.59,14.26 J1.11 | v14.22,55.67 12.95,54.4 12.95,54.14 U2.5 | v10.22,47.73 7.8,45.32 7.8,44.17 TP11.TP
  Bottom 0.15: v81.59,13.5 83.81,13.5 85.53,15.22 85.53,19.28 81.4,23.41 74.8,23.41 74.73,23.34 70.42,23.34 68.89,24.87 68.89,25 38.22,55.67 v14.22,55.67 14.22,53.25 10.22,49.25 v10.22,47.73
EPD_RST  (via drill 0.3)
  Top 0.15: v83.43,12.3 82.1,13.63 82.1,14.26 J1.10 | v90.93,23.98 79.11,23.98 v73.72,29.38 | v37.14,58.02 v32.12,58.02 | v23.74,64.37 16.76,71.35 16.76,71.54 U2.21 16.76,71.67 16.76,71.86 18.09,73.19 v35.81,73.19 | v68.76,106.15 74.23,106.15 TP12.TP
  Bottom 0.15: v83.43,12.3 83.94,12.3 89.15,17.5 89.15,22.2 v90.93,23.98 | v73.72,29.38 65.78,29.38 v37.14,58.02 | v32.12,58.02 30.09,58.02 v23.74,64.37 | v35.81,73.19 v68.76,106.15
FLASH_CS  (via drill 0.3)
  Top 0.15: v130.17,62.08 131.18,62.08 R5.1 | v38.67,65.89 37.84,65.89 U1.1 | v37.78,61.51 37.78,58.02 37.14,57.38 37.14,55.29 D9.1 | v34.22,61.64 34.22,61.57 33.78,61.13 28.57,61.13 21.84,54.4 21.84,54.14 U2.12
  Bottom 0.15: v130.17,62.08 129.98,62.08 125.6,66.46 47.37,66.46 46.79,65.89 v38.67,65.89 38.67,65.83 37.78,64.94 v37.78,61.51 37.71,61.64 v34.22,61.64
GDR  (via drill 0.3)
  Top 0.15: v87.05,17.38 87.05,16.74 86.1,15.79 86.1,14.33 J1.2 | v79.31,18.65 v87.05,18.65 | v65.34,13.31 63.3,11.28 Q3.1 | v93.66,42.97 93.66,50.78 96.45,53.57 96.45,55.79 R4.1 | v93.66,30.14 v93.66,38.97
  Bottom 0.15: v87.05,17.38 v87.05,18.65 87.05,21.19 93.78,27.92 93.78,28.3 93.66,28.43 v93.66,30.14 | v79.31,18.65 78.29,18.65 76.26,16.61 68.51,16.61 67.05,15.15 67.05,15.03 v65.34,13.31 | v93.66,38.97 v93.66,42.97
GND  (via drill 0.3, 0.35)
  Top 0.15: 64.89,7.72 66.29,6.33 69.02,6.33 R2.1 | 64.89,7.72 63.49,7.72 62.67,6.9 62.67,6.77 SJ1.1 | EPD_C10.1 69.59,14.71 67.43,14.71 EPD_C2.1 67.3,14.65 67.24,14.65 v66.61,15.28 | R1_PWRUSB.1 66.16,22.39 66.16,20.3 v66.1,20.23 22.28,20.23 | v65.02,7.91 64.89,7.79 64.89,7.72 | 78.86,14.9 82.86,14.9 83.05,14.71 83.05,14.33 J1.8 83.12,14.26 83.12,13.88 85.21,11.79 87.56,11.79 J1.MP1 | 78.86,14.9 78.61,14.65 78.61,14.33 J1.17 78.54,14.26 78.54,13.38 76.96,11.79 74.1,11.79 J1.MP2 74.1,11.85 72.51,13.44 72.51,17.06 | 72.51,17.06 72.51,19.85 74.54,21.88 75.31,21.88 EPD_C12.1 | v72.45,17.06 72.51,17.06 | 125.28,41.82 125.28,37.25 124.58,36.55 124.58,36.36 R2_BAT.1 | 125.28,41.82 123.88,43.22 123.69,43.22 MCP73831.2 123.63,43.22 122.55,43.22 122.23,42.9 121.15,42.9 120.2,43.86 118.48,43.86 | 118.48,43.86 117.79,43.86 D8.2 | 103.18,23.15 101.59,23.15 99.94,21.5 EPD_C9.1 99.88,21.5 99.82,21.57 95.94,21.57 EPD_C8.1 95.82,21.63 91.81,21.63 EPD_C7.1 91.75,21.63 87.75,21.63 EPD_C6.1 87.69,21.69 83.5,21.69 EPD_C11.1 83.5,21.76 78.99,21.76 EPD_C1.1 78.99,21.69 78.86,21.57 78.86,14.9 | 103.18,23.15 104.32,23.15 104.52,22.96 104.52,22.14 103.88,21.5 103.88,21.31 EPD_C5.1 | 103.18,23.15 103.18,32.68 D3.1 103.18,32.74 104.2,33.76 110.17,33.76 C7.2 110.23,33.82 110.42,33.82 118.48,41.89 118.48,43.86 | 114.87,54.78 115.25,54.4 116.71,54.4 117.34,55.03 117.53,55.03 C1_BAT2.2 117.6,55.09 121.72,55.09 125.15,58.52 125.91,58.52 126.49,57.95 IC4.2 126.49,57.89 126.87,58.27 126.87,58.33 127.57,59.03 133.92,59.03 U4.1 133.98,59.03 134.3,59.03 134.99,58.33 U4.9
  Top 0.15: 114.87,54.78 114.87,56.37 117.53,59.03 C1_BAT1.2 | U4.4 133.98,57.57 134.3,57.57 134.99,58.27 U4.9 | U4.6 135.88,58.08 135.25,58.08 135.06,58.27 U4.9 | C10_SUPERCAP.1 103.44,52.3 102.29,52.3 97.53,57.06 96.51,57.06 R4.2 96.45,57.06 v95.62,57.06 | v88.39,59.86 87.05,61.19 87.05,61.51 U3.13 | 114.87,54.78 110.61,54.78 107.12,51.28 104.45,51.28 103.5,52.24 C10_SUPERCAP.1 | 140.55,50.05 133.15,42.65 133.15,42.46 C_DELAY.2 133.15,42.39 130.49,42.39 129.72,43.16 C3.- 129.66,43.09 v128.26,43.09 | 140.55,50.05 141.57,51.06 | 141.57,51.06 145.73,55.22 145.73,55.41 R2-USB.2 | 153.28,5.25 154.68,5.25 C2.2 | 153.28,5.25 151.82,5.25 C1.2 | 153.28,10.07 153.41,10.07 153.85,10.52 SENSOR2.7 153.92,10.77 153.92,10.52 154.36,10.07 155,10.07 155.44,10.52 155.44,10.77 SENSOR2.5 155.57,10.84 162.81,18.07 164.14,18.07 J3.1 164.27,18.07 164.46,18.07 165.09,18.71 165.09,49.32 J2.MP3 | 153.28,10.07 152.77,10.07 152.58,10.26 152.58,11.34 153.03,11.79 153.03,13.69 SENSOR2.1 | 153.28,10.07 153.28,5.25 | J2.A1 163.63,51.16 163.63,51.35 J2.B12 | J2.A1 163.63,51.09 163.63,49.89 164.14,49.38 J2.MP3 | J2.MP1 168.08,49.38 164.2,49.38 J2.MP3 | 149.35,53.44 150.11,53.44 150.62,53.95 151.76,53.95 R2-USB1.1 151.82,54.02 159.57,54.02 163,57.44 163.57,57.44 J2.B1 163.63,57.57 163.63,57.76 J2.A12 | 149.35,53.44 148.77,54.02 D1.2 | 149.35,53.44 149.28,53.44 147.7,51.86 C5_USB.2 147.7,51.79 147.7,50.21 148.01,49.89 C4_USB.2 148.08,49.82 148.52,49.38 148.52,44.05 148.39,43.92 146.68,43.92 140.55,50.05 | J2.A12 163.63,57.83 163.63,59.03 164.14,59.54 J2.MP4 164.2,59.6 168.08,59.6 J2.MP2
  Top 0.15: J2.A1 163.7,50.97 164.97,50.97 165.28,51.28 165.28,57.63 164.97,57.95 163.7,57.95 J2.A12 | v136.65,55.98 135.31,57.32 135.31,58.02 U4.9 | v141.54,51.09 141.57,51.06 | v125.41,41.82 125.28,41.82 | C9.2 38.92,54.97 38.67,55.22 D9.2 | U1.4 37.84,62.08 38.6,61.32 38.6,55.35 D9.2 | TP5.TP 9.2,6.9 14.22,6.9 TP4.TP 14.28,6.83 17.65,6.83 18.79,5.69 19.87,5.69 22.28,8.11 22.28,20.23 | C2_BAT.2 31.62,38.78 31.62,40.55 32.44,41.38 32.44,42.78 31.81,43.41 D10.2 | 25.01,38.65 26.98,38.65 27.05,38.59 C8.2 | 25.01,38.65 22.98,38.65 C1_BAT.2 22.98,38.59 22.28,37.89 22.28,20.23 | 25.01,42.52 26.79,42.52 26.98,42.71 D11.2 27.11,42.71 27.81,43.41 31.68,43.41 D10.2 | 25.01,42.52 22.98,42.52 D12.2 22.92,42.52 22.28,42.52 12.12,52.68 9.01,52.68 7.87,53.83 7.87,54.08 U2.1 7.87,54.14 7.87,55.67 12.25,60.05 U2.29_1 | v25.01,38.84 25.01,38.65 | v25.01,42.46 25.01,42.52 | D9.2 38.92,54.9 38.92,50.59 31.81,43.47 D10.2 | 48.7,107.86 51.05,107.86 CHANGE_BUTTON.2 51.11,107.86 52.7,107.86 52.89,108.05 59.62,108.05 60.32,108.75 61.72,108.75 62.54,107.93 BOOT_BUTTON.1 62.6,107.93 66.03,107.93 BOOT_BUTTON.2 66.1,107.86 66.99,106.97 67.75,106.97 C6.2 | 48.7,107.86 47.62,107.86 CHANGE_BUTTON.1 | 17.71,102.53 12.44,102.53 D6.2 | 17.71,102.53 22.92,102.53 27.43,107.04 28.12,107.04 C5.2 28.19,107.1 29.33,107.1 30.54,108.31 44.13,108.31 45.33,107.1 C10.2 | IC1.3 60.83,90.34 60.7,90.34 45.4,105.64 45.4,106.97 C10.2 | 17.71,102.53 17.71,94.91 16.95,94.15 16.95,93.13 J4.G2 16.95,93.07 17.71,92.31 17.71,89.26 16.95,88.5 16.95,87.42 J4.G1 16.89,87.35 16.89,86.4 14.28,83.8 2.79,83.8 J4.G3
  Top 0.15: v46.09,107.74 45.4,107.04 C10.2 | v48.7,107.8 48.7,107.86 | RESET_BUTTON.2 26.03,107.86 22.6,107.86 RESET_BUTTON.1 22.54,107.8 13.52,107.8 5.45,99.74 5.45,98.08 4.88,97.51 3.74,97.51 J4.G4 3.68,97.51 3.68,96.5 5.45,94.72 | 5.45,94.72 6.28,94.72 J4.P6 | J4.G3 2.66,84.43 2.66,91.86 5.45,94.66 5.45,94.72 | U2.29_1 12.31,60.11 12.31,61.32 U2.29_2 12.31,61.38 12.31,62.52 U2.29_3 | U2.29_4 13.52,60.11 12.38,60.11 U2.29_1 | U2.29_7 14.85,60.11 14.85,61.32 U2.29_8 14.79,61.38 13.65,61.38 U2.29_5 13.58,61.38 13.58,62.52 U2.29_6 | U2.29_3 12.31,62.65 13.52,62.65 U2.29_6 | U2.29_6 13.58,62.65 14.79,62.65 U2.29_9 14.85,62.59 14.92,62.52 35.36,62.52 36.82,63.99 41.65,63.99 U1.9 | U2.29_3 12.31,62.71 7.87,67.16 7.87,71.54 U2.28 7.87,71.67 2.72,76.81 2.72,84.37 J4.G3 | v95.05,41.76 92.96,39.66 v92.9,39.64 92.89,39.6 v88.96,35.66 | v103.5,51.16 104.01,51.67 C10_SUPERCAP.1 | v8.06,108.05 v5.52,108.05 | v63.68,108.31 63.94,108.05 66.8,108.05 67.88,106.97 67.88,106.91 67.81,106.85 v66.92,106.85 | v34.54,71.03 v31.93,71.03 | v31.17,67.67 31.43,67.41 v31.55,67.41 | v42.22,71.03 v42.22,68.3 | v45.14,79.73 45.4,79.73 v45.59,79.54 | v63.18,97.13 63.11,97.2 62.54,97.2 v62.48,97.13 | v52.25,86.91 52.32,86.91 v53.27,85.96 | v59.87,91.8 v59.37,91.8 | v77.35,83.33 77.4,83.29 84.39,76.3 84.45,76.3 84.45,76.37 77.46,83.35 84.39,90.27 84.39,90.4 84.32,90.46 77.27,83.42 71.24,89.45 71.24,89.58 84.32,102.66 84.39,102.66 84.39,90.46 77.27,83.35 71.18,89.45 71.18,89.58 84.32,102.72 84.39,102.72 84.45,102.66 84.45,90.27 77.4,83.23 84.45,76.18 84.51,76.18 84.51,102.66 84.32,102.85 71.05,89.58 71.11,89.51 71.11,89.45 84.51,76.05 84.58,76.05 84.58,102.72 84.39,102.91 84.32,102.91 70.99,89.58 71.05,89.51 84.51,102.97 84.58,102.91 84.64,102.91 84.7,102.97 84.7,103.29 84.64,103.36 84.51,103.23 84.45,103.23 82.54,105.13 82.54,105.2 84.7,105.2 84.7,103.36 84.45,103.1 84.45,103.04 84.39,102.97 84.32,102.97 70.92,89.58 84.58,75.92 84.64,75.92 84.64,102.78 84.32,103.1 84.26,103.1 76.83,110.53 75.18,108.88 75.11,108.88 73.46,110.53 73.46,110.59 76.89,110.59 76.96,110.53 77.02,110.53 84.39,103.16 84.39,103.1 70.86,89.58 84.64,75.8 84.7,75.8 84.7,102.91 76.96,110.66 73.34,110.66 73.27,110.59 75.05,108.82 75.05,108.75 73.27,106.97 73.21,106.97 73.21,110.66 73.27,110.72 77.02,110.72 77.08,110.66 90.99,110.66 91.05,110.59 85.91,105.45 85.91,105.39 91.62,105.39 91.62,110.66 91.05,110.66 85.78,105.39 85.78,105.32 91.69,105.32 91.69,110.72 77.08,110.72 73.21,106.85 73.15,106.85 73.15,110.72 73.21,110.78 91.75,110.78 91.75,105.26 85.53,105.26 85.47,105.2 85.47,75.61 91.75,69.32 91.81,69.32 91.81,110.85 73.15,110.85 73.08,110.78 73.08,106.53 73.02,106.47 70.42,106.47 70.42,110.85 73.08,110.85 78.48,105.45 78.48,105.39 73.72,100.62 73.65,100.62 68.38,105.89 62.6,105.89 61.53,106.97 61.46,106.97 61.46,106.72 62.35,105.83 v67.49,105.83 67.56,105.83 67.56,100.62 70.61,97.58 70.67,97.58 73.59,100.5 73.59,100.56 68.38,105.77 67.62,105.77 67.62,100.62 70.61,97.64 70.67,97.64 73.53,100.5 73.53,100.56 68.38,105.7 67.69,105.7 67.69,100.62 70.61,97.7 70.67,97.7 73.46,100.5 73.46,100.56 68.38,105.64 67.75,105.64 67.75,100.62 70.61,97.77 70.67,97.77 73.4,100.5 73.4,100.56 68.38,105.58 67.81,105.58 67.81,100.62 70.61,97.83 70.67,97.83 73.34,100.5 73.34,100.56 68.38,105.51 67.88,105.51 67.88,100.62 70.61,97.89 70.67,97.89 73.27,100.5 73.27,100.56 68.38,105.45 67.94,105.45 67.94,100.62 70.61,97.96 70.67,97.96 73.21,100.5 73.21,100.56 68.38,105.39 68,105.39 68,100.62 70.61,98.02 70.67,98.02 73.15,100.5 73.15,100.56 68.38,105.32 68.07,105.32 68.07,100.62 70.61,98.08 70.67,98.08 73.08,100.5 73.08,100.56 68.38,105.26 68.13,105.26 68.13,100.62 70.61,98.15 70.67,98.15 73.02,100.5 73.02,100.56 68.38,105.2 68.19,105.2 68.19,100.62 70.61,98.21 70.67,98.21 72.96,100.5 72.96,100.56 68.38,105.13 68.26,105.13 68.26,100.62 70.61,98.28 70.67,98.28 72.89,100.5 72.89,100.56 68.38,105.07 68.32,105.07 68.32,100.62 70.61,98.34 70.67,98.34 72.83,100.5 72.83,100.56 68.45,104.94 68.38,104.94 68.38,100.62 70.61,98.4 70.67,98.4 72.77,100.5 72.77,100.56 68.51,104.82 68.45,104.82 68.45,100.62 70.61,98.47 70.67,98.47 72.7,100.5 72.7,100.56 68.57,104.69 68.51,104.69 68.51,100.62 70.61,98.53 70.67,98.53 72.64,100.5 72.64,100.56 68.64,104.56 68.57,104.56 68.57,100.62 70.61,98.59 70.67,98.59 72.57,100.5 72.57,100.56 68.7,104.43 68.64,104.43 68.64,100.62 70.61,98.66 70.67,98.66 72.51,100.5 72.51,100.56 68.76,104.31 68.7,104.31 68.7,100.62 70.61,98.72 70.67,98.72 72.45,100.5 72.45,100.56 68.83,104.18 68.76,104.18 68.76,100.62 70.61,98.78 70.67,98.78 72.38,100.5 72.38,100.56 68.89,104.05 68.83,104.05 68.83,100.62 70.61,98.85 70.67,98.85 72.32,100.5 72.32,100.56 68.95,103.93 68.89,103.93 68.89,100.62 70.61,98.91 70.67,98.91 72.26,100.5 72.26,100.56 69.02,103.8 68.95,103.8 68.95,100.62 70.61,98.97 70.67,98.97 72.19,100.5 72.19,100.56 69.08,103.67 69.02,103.67 69.02,100.62 70.61,99.04 70.67,99.04 72.13,100.5 72.13,100.56 69.15,103.55 69.08,103.55 69.08,100.62 70.61,99.1 70.67,99.1 72.07,100.5 72.07,100.56 69.21,103.42 69.15,103.42 69.15,100.62 70.61,99.16 70.67,99.16 72,100.5 72,100.56 69.27,103.29 69.21,103.29 69.21,100.62 70.61,99.23 70.67,99.23 71.94,100.5 71.94,100.56 69.34,103.16 69.27,103.16 69.27,100.62 70.61,99.29 70.67,99.29 71.88,100.5 71.88,100.56 69.4,103.04 69.34,103.04 69.34,100.62 70.61,99.35 70.67,99.35 71.81,100.5 71.81,100.56 69.46,102.91 69.4,102.91 69.4,100.62 70.61,99.42 70.67,99.42 71.75,100.5 71.75,100.56 69.53,102.78 69.46,102.78 69.46,100.62 70.61,99.48 70.67,99.48 71.69,100.5 71.69,100.56 69.59,102.66 69.53,102.66 69.53,100.62 70.61,99.55 70.67,99.55 71.62,100.5 71.62,100.56 69.65,102.53 69.59,102.53 69.59,100.62 70.61,99.61 70.67,99.61 71.56,100.5 71.56,100.56 69.72,102.4 69.65,102.4 69.65,100.62 70.61,99.67 70.67,99.67 71.5,100.5 71.5,100.56 69.78,102.28 69.72,102.28 69.72,100.62 70.61,99.74 70.67,99.74 71.43,100.5 71.43,100.56 69.84,102.15 69.78,102.15 69.78,100.62 70.61,99.8 70.67,99.8 71.37,100.5 71.37,100.56 69.91,102.02 69.84,102.02 69.84,100.62 70.61,99.86 70.67,99.86 71.3,100.5 71.3,100.56 69.97,101.89 69.91,101.89 69.91,100.62 70.61,99.93 70.67,99.93 71.24,100.5 71.24,100.56 70.03,101.77 69.97,101.77 69.97,100.62 70.61,99.99 70.67,99.99 71.18,100.5 71.18,100.56 70.1,101.64 70.03,101.64 70.03,100.62 70.61,100.05 70.67,100.05 71.11,100.5 71.11,100.56 70.16,101.51 70.1,101.51 70.1,100.62 70.61,100.12 70.67,100.12 71.05,100.5 71.05,100.56 70.22,101.39 70.16,101.39 70.16,100.62 70.61,100.18 70.67,100.18 70.99,100.5 70.99,100.56 70.29,101.26 70.22,101.26 70.22,100.62 70.61,100.24 70.67,100.24 70.92,100.5 70.92,100.56 70.35,101.13 70.29,101.13 70.29,100.62 70.61,100.31 70.67,100.31 70.86,100.5 70.86,100.56 70.42,101.01 70.35,101.01 70.35,100.62 70.61,100.37 70.67,100.37 70.8,100.5 70.8,100.56 70.48,100.88 70.42,100.88 70.42,100.62 70.61,100.43 70.67,100.43 70.73,100.5 70.73,100.56 70.54,100.75 70.48,100.75 70.48,100.62 70.61,100.5 70.67,100.5 70.67,100.56 v70.54,100.69
  Top 0.15: v66.54,98.72 v67.94,97.32 | v70.73,104.75 69.65,104.75 68.76,105.64 68.76,105.7 73.15,105.7 73.15,101.26 73.65,100.75 73.72,100.75 78.35,105.39 78.35,105.45 75.18,108.63 75.11,108.63 73.97,107.48 73.97,107.42 76.32,107.42 78.29,105.45 78.29,105.39 73.72,100.81 73.65,100.81 73.21,101.26 73.21,105.45 73.27,105.45 75.75,102.97 75.81,102.97 78.23,105.39 78.23,105.45 76.32,107.36 74.73,107.36 74.73,107.29 76.32,107.29 78.16,105.45 78.16,105.39 75.81,103.04 75.75,103.04 73.65,105.13 73.27,104.75 73.27,101.26 73.65,100.88 73.72,100.88 75.75,102.91 73.65,105.01 73.59,105.01 73.34,105.26 73.27,105.26 73.27,104.82 75.43,102.66 73.72,100.94 73.65,100.94 73.34,101.26 73.34,104.69 73.59,104.94 73.65,104.94 75.69,102.91 75.5,102.72 75.43,102.72 73.46,104.69 73.46,104.75 73.34,104.88 73.34,105.2 73.4,105.26 73.53,105.13 73.4,105.01 73.4,104.94 75.5,102.85 75.56,102.85 75.62,102.91 73.65,104.88 73.59,104.88 73.59,104.82 73.53,104.75 73.53,104.69 75.37,102.85 75.43,102.85 75.5,102.91 75.5,102.97 73.72,104.75 73.65,104.75 73.59,104.69 75.37,102.91 75.43,102.97 v73.72,104.69 | v76.64,103.93 74.92,103.93 73.97,104.88 73.97,104.94 77.65,104.94 78.1,105.39 78.1,105.45 76.32,107.23 74.99,107.23 74.99,107.17 77.15,105.01 77.65,105.01 78.04,105.39 78.04,105.45 76.32,107.17 v75.24,107.17 | v72.96,108.88 70.54,108.88 70.54,106.59 72.96,106.59 72.96,108.82 70.61,108.82 70.61,106.66 v72.89,106.66 | v72.89,105.64 68.89,105.64 68.89,105.58 69.65,104.82 73.08,104.82 73.08,101.39 73.02,101.39 69.78,104.63 69.78,104.69 73.02,104.69 73.02,101.51 72.96,101.51 69.91,104.56 69.91,104.63 72.96,104.63 72.96,101.64 72.89,101.64 70.03,104.5 70.03,104.56 72.89,104.56 72.89,101.77 72.83,101.77 70.16,104.43 70.16,104.5 72.83,104.5 72.83,101.89 72.77,101.89 70.29,104.37 70.29,104.43 72.77,104.43 72.77,102.02 72.7,102.02 70.42,104.31 70.42,104.37 72.7,104.37 72.7,102.15 72.64,102.15 70.54,104.24 70.54,104.31 72.64,104.31 72.64,102.28 72.57,102.28 70.67,104.18 70.67,104.24 72.57,104.24 72.57,102.4 72.51,102.4 70.8,104.12 70.8,104.18 72.51,104.18 72.51,102.53 72.45,102.53 70.92,104.05 70.92,104.12 72.45,104.12 72.45,102.66 72.38,102.66 71.05,103.99 71.05,104.05 72.38,104.05 72.38,102.78 72.32,102.78 71.18,103.93 71.18,103.99 72.32,103.99 72.32,102.91 72.26,102.91 71.3,103.86 71.3,103.93 72.26,103.93 72.26,103.04 72.19,103.04 71.43,103.8 71.43,103.86 72.19,103.86 72.19,103.16 72.13,103.16 71.56,103.74 71.56,103.8 72.13,103.8 72.13,103.29 72.07,103.29 71.69,103.67 71.69,103.74 72.07,103.74 72.07,103.42 72,103.42 71.81,103.61 71.81,103.67 72,103.67 72,103.55 71.94,103.55 v71.88,103.61
  Top 0.15: v73.4,103.67 73.4,104.56 73.46,104.56 75.37,102.66 73.72,101.01 73.65,101.01 73.4,101.26 73.4,103.61 73.84,104.05 73.84,104.12 73.53,104.43 73.46,104.43 73.46,103.74 74.92,102.28 73.72,101.07 73.65,101.07 73.46,101.26 73.46,103.61 73.53,103.61 73.91,103.99 73.97,103.99 75.31,102.66 74.99,102.34 74.92,102.34 73.65,103.61 73.53,103.48 73.53,101.26 73.65,101.13 73.72,101.13 74.86,102.28 73.65,103.48 73.59,103.48 73.59,101.26 73.65,101.2 73.72,101.2 74.8,102.28 73.72,103.36 73.65,103.36 73.65,101.26 73.72,101.26 74.73,102.28 73.78,103.23 73.72,103.23 73.72,101.39 73.78,101.39 74.67,102.28 73.84,103.1 73.78,103.1 73.78,101.51 73.84,101.51 74.61,102.28 73.91,102.97 73.84,102.97 73.84,101.64 73.91,101.64 74.54,102.28 73.97,102.85 73.91,102.85 73.91,101.77 73.97,101.77 74.48,102.28 74.03,102.72 73.97,102.72 73.97,101.89 74.03,101.89 74.42,102.28 74.1,102.59 74.03,102.59 74.03,102.02 74.1,102.02 74.35,102.28 74.16,102.47 74.1,102.47 74.1,102.15 74.16,102.15 74.29,102.28 74.23,102.34 74.16,102.34 v74.16,102.21 | v75.62,100.05 74.16,100.05 69.84,95.74 69.84,91.86 70.16,91.54 70.16,90.34 70.1,90.34 69.91,90.53 69.91,90.59 70.1,90.78 70.1,91.54 70.03,91.61 82.8,104.37 82.8,104.43 80.83,106.4 80.77,106.4 80.77,106.28 82.67,104.37 82.73,104.37 84.13,102.97 71.18,90.02 71.11,90.02 71.11,90.53 71.62,90.53 84.13,103.04 84.13,103.1 82.92,104.31 82.86,104.31 70.42,91.86 70.35,91.86 69.91,92.31 69.91,95.74 74.16,99.99 78.35,99.99 82.67,104.31 80.83,106.15 80.89,106.21 80.96,106.21 v82.73,104.43 | v85.59,102.78 85.59,105.13 91.69,105.13 91.69,69.57 91.62,69.57 85.59,75.61 85.59,102.72 87.94,105.07 91.62,105.07 91.62,69.7 91.56,69.7 85.66,75.61 85.66,102.72 87.94,105.01 91.56,105.01 91.56,69.83 91.5,69.83 85.72,75.61 85.72,102.72 87.94,104.94 91.5,104.94 91.5,69.95 91.43,69.95 85.78,75.61 85.78,102.72 87.94,104.88 91.43,104.88 91.43,70.08 91.37,70.08 85.85,75.61 85.85,102.72 87.94,104.82 91.37,104.82 91.37,70.21 91.31,70.21 85.91,75.61 85.91,102.72 87.94,104.75 91.31,104.75 91.31,70.33 91.24,70.33 85.97,75.61 85.97,102.72 87.94,104.69 91.24,104.69 91.24,70.46 91.18,70.46 86.04,75.61 86.04,102.72 87.94,104.63 91.18,104.63 91.18,70.59 91.12,70.59 86.1,75.61 86.1,102.72 87.94,104.56 91.12,104.56 91.12,70.72 91.05,70.72 86.16,75.61 86.16,102.72 87.94,104.5 91.05,104.5 91.05,70.84 90.99,70.84 86.23,75.61 86.23,102.72 87.94,104.43 90.99,104.43 90.99,70.97 90.93,70.97 86.29,75.61 86.29,102.72 87.94,104.37 90.93,104.37 90.93,71.1 90.86,71.1 86.35,75.61 86.35,102.72 87.94,104.31 90.86,104.31 90.86,71.22 90.8,71.22 86.42,75.61 86.42,102.72 87.94,104.24 90.8,104.24 90.8,71.35 90.74,71.35 86.48,75.61 86.48,102.72 87.94,104.18 90.74,104.18 90.74,71.48 90.67,71.48 86.54,75.61 86.54,102.72 87.94,104.12 90.67,104.12 90.67,71.61 90.61,71.61 86.61,75.61 86.61,102.72 87.94,104.05 90.61,104.05 90.61,71.73 90.55,71.73 86.67,75.61 86.67,102.72 87.94,103.99 90.55,103.99 90.55,71.86 90.48,71.86 86.73,75.61 86.73,102.72 87.94,103.93 90.48,103.93 90.48,71.99 90.42,71.99 86.8,75.61 86.8,102.72 87.94,103.86 90.42,103.86 90.42,72.11 90.35,72.11 86.86,75.61 86.86,102.72 87.94,103.8 90.35,103.8 90.35,72.24 90.29,72.24 86.93,75.61 86.93,102.72 87.94,103.74 90.29,103.74 90.29,72.37 90.23,72.37 86.99,75.61 86.99,102.72 87.94,103.67 90.23,103.67 90.23,72.49 90.16,72.49 87.05,75.61 87.05,102.72 87.94,103.61 90.16,103.61 90.16,72.62 90.1,72.62 87.12,75.61 87.12,102.72 87.94,103.55 90.1,103.55 90.1,72.75 90.04,72.75 87.18,75.61 87.18,102.72 87.94,103.48 90.04,103.48 90.04,72.88 89.97,72.88 87.24,75.61 87.24,102.72 87.94,103.42 89.97,103.42 89.97,73 89.91,73 87.31,75.61 87.31,102.72 87.94,103.36 89.91,103.36 89.91,73.13 89.85,73.13 87.37,75.61 87.37,102.72 87.94,103.29 89.85,103.29 89.85,73.26 89.78,73.26 87.43,75.61 87.43,102.72 87.94,103.23 89.78,103.23 89.78,73.38 89.72,73.38 87.5,75.61 87.5,102.72 87.94,103.16 89.72,103.16 89.72,73.51 89.66,73.51 87.56,75.61 87.56,102.72 87.94,103.1 89.66,103.1 89.66,73.64 89.59,73.64 87.62,75.61 87.62,102.72 87.94,103.04 89.59,103.04 89.59,73.76 89.53,73.76 87.69,75.61 87.69,102.72 87.94,102.97 89.53,102.97 89.53,73.89 89.47,73.89 87.75,75.61 87.75,102.72 87.94,102.91 89.47,102.91 89.47,74.02 89.4,74.02 87.81,75.61 87.81,102.72 87.94,102.85 89.4,102.85 89.4,74.14 89.34,74.14 87.88,75.61 87.88,102.72 87.94,102.78 89.34,102.78 89.34,74.27 89.28,74.27 87.94,75.61 87.94,102.72 89.28,102.72 89.28,74.4 89.21,74.4 88,75.61 88,102.66 89.21,102.66 89.21,74.53 89.15,74.53 88.07,75.61 88.07,102.59 89.15,102.59 89.15,74.65 89.08,74.65 88.13,75.61 88.13,102.53 89.08,102.53 89.08,74.78 89.02,74.78 88.2,75.61 88.2,102.47 89.02,102.47 89.02,74.91 88.96,74.91 88.26,75.61 88.26,102.4 88.96,102.4 88.96,75.03 88.89,75.03 88.32,75.61 88.32,102.34 88.89,102.34 88.89,75.16 88.83,75.16 88.39,75.61 88.39,102.28 88.83,102.28 88.83,75.29 88.77,75.29 88.45,75.61 88.45,102.21 88.77,102.21 88.77,75.42 88.7,75.42 88.51,75.61 88.51,102.15 88.7,102.15 88.7,75.54 88.64,75.54 88.58,75.61 88.58,102.08 88.64,102.08 v88.64,75.61